# Altium PCB Generic_Axis_Channel_Blade.PcbDoc (part 3 of 3)
Units mm, origin at the board's own origin, x right, y up, seen from the top; angles counter-clockwise.
Board outline 87.5 x 97.62 mm, 4 copper layers (Top Layer 1, L2_GND, L3_PWR, Bottom Layer 1), stack 1.556 mm thick; 166 components, 595 nets, 662 pads, 1674 vias.
Unrouted connection lines stored in the file: 33.
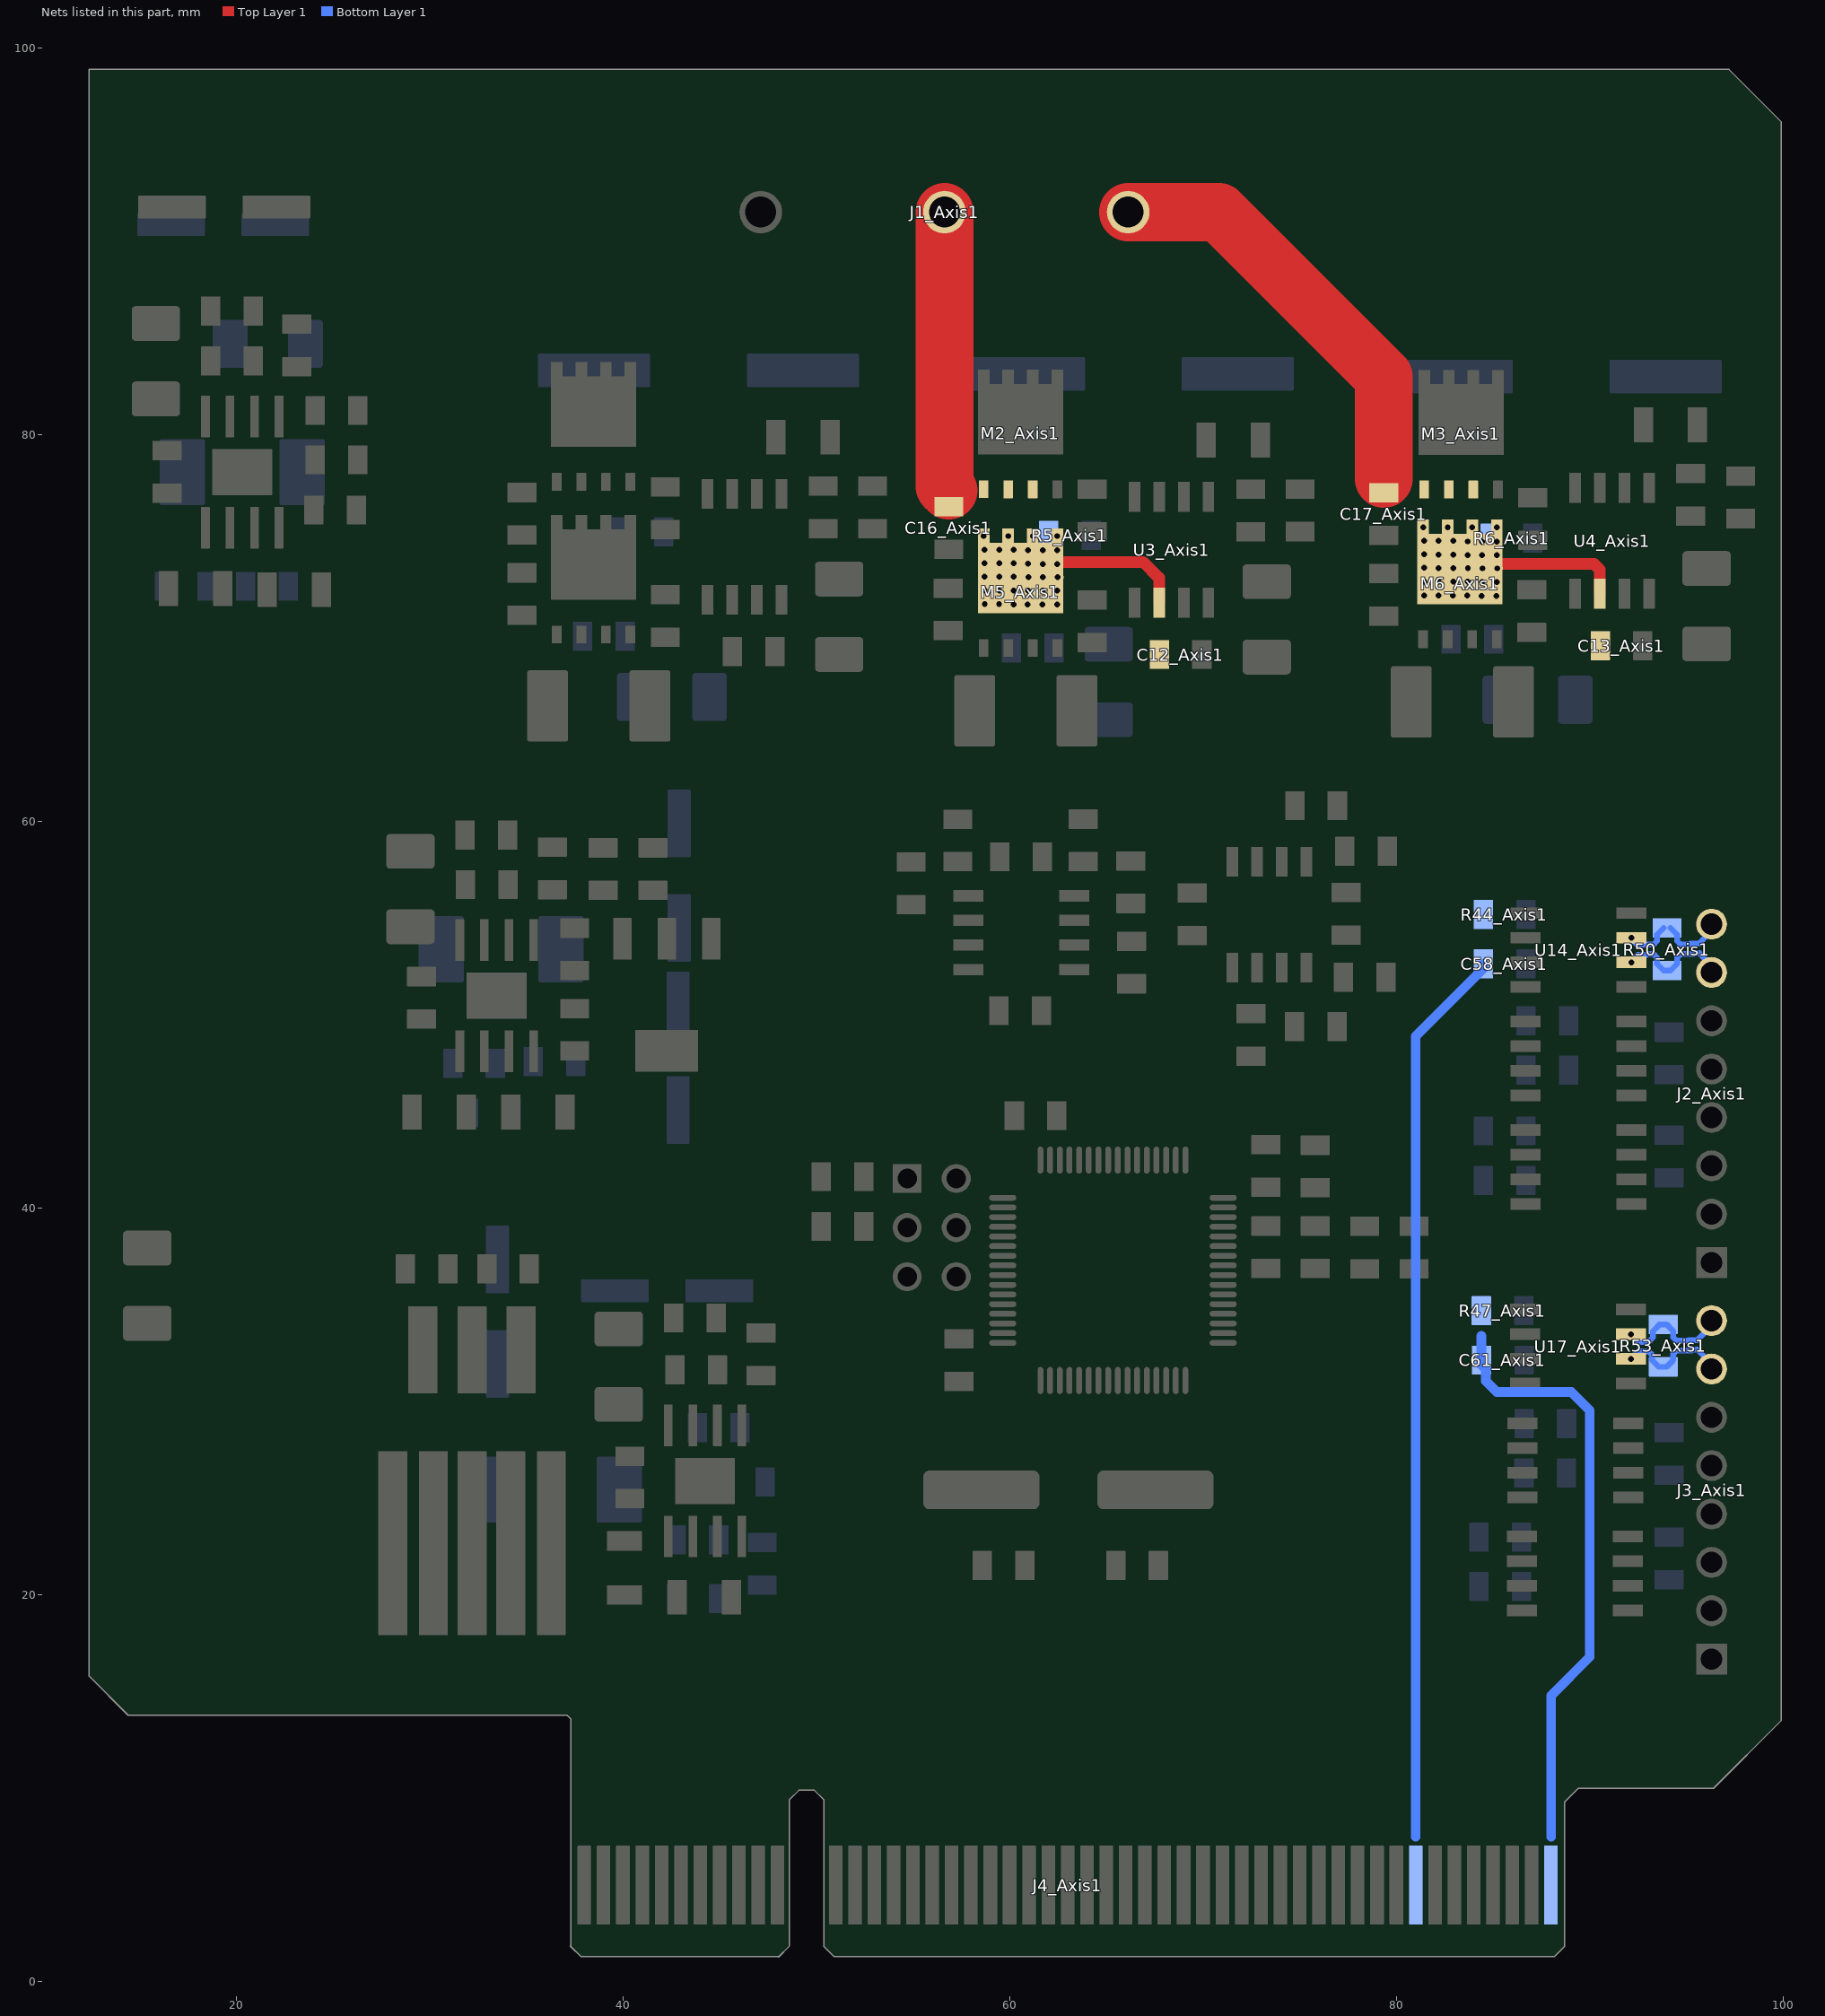
[diagram p5: the nets of this part, all layers, seen from the top]

## Via types
v1: diameter 0.6/0.6 (per signal layer), hole 0.3, Top Layer 1 to Bottom Layer 1, 1674 vias

## Nets (pads, with @x,y where several pads share a name; then routed paths per layer and width w, separated by ;. In a path a pad name is that pad's centre, name@x,y a point inside that pad or via, vN(x,y) a via of type N, cw(c..) or ccw(c..) an arc to the next point about the centre after c; other vN are vias at no path point) (continued)
Va_Axis4: 
Va_Axis5: 
Va_Axis6: 
Vb_Axis1: C12_Axis1.1 C16_Axis1.1 J1_Axis1.2 M2_Axis1.1 M2_Axis1.2 M2_Axis1.3 M5_Axis1.5 M5_Axis1.6 M5_Axis1.7 M5_Axis1.8 R5_Axis1.1 U3_Axis1.6 | length 21.1
  Top Layer 1 w0.6: M5_Axis1.5@62.729,73.432 66.897,73.432 67.729,72.601 U3_Axis1.6@67.729,71.323
  Top Layer 1 w3: J1_Axis1.2@56.629,91.523 56.629,77.346 56.852,77.123
  other v1: 60.936,71.228 61.69,71.222 62.451,71.222 58.712,71.246 59.455,71.246 60.199,71.24 61.708,71.942 62.468,71.942 58.702,71.967 59.456,71.96 60.217,71.96 60.954,71.949 60.972,72.649 61.726,72.642 62.486,72.642 58.702,72.667 59.456,72.66 60.217,72.66 60.954,73.334 61.708,73.327 62.469,73.327 58.702,73.367 59.456,73.36 60.217,73.36 61.708,74.027 62.469,74.027 60.954,74.034 58.702,74.067 59.456,74.06 60.217,74.06 58.657,74.769 59.927,74.769 61.197,74.769 62.467,74.769
Vb_Axis2: 
Vb_Axis3: 
Vb_Axis4: 
Vb_Axis5: 
Vb_Axis6: 
Vc_Axis1: C13_Axis1.1 C17_Axis1.1 J1_Axis1.3 M3_Axis1.1 M3_Axis1.2 M3_Axis1.3 M6_Axis1.5 M6_Axis1.6 M6_Axis1.7 M6_Axis1.8 R6_Axis1.1 U4_Axis1.6 | length 28.6
  Top Layer 1 w0.6: v1(81.429,73.823) M6_Axis1.5@81.529,73.923 ; M6_Axis1.5@85.438,73.323 90.229,73.323 90.514,73.038 U4_Axis1.6@90.514,71.782
  Top Layer 1 w3: J1_Axis1.3@66.129,91.523 70.829,91.523 79.345,83.007 79.345,77.723
  other v1: 83.663,71.684 84.417,71.678 85.178,71.678 81.439,71.702 82.182,71.702 82.926,71.696 84.435,72.398 85.196,72.398 81.429,72.423 82.183,72.416 82.944,72.416 83.681,72.405 83.699,73.105 84.453,73.098 85.213,73.098 81.429,73.123 82.183,73.116 82.944,73.116 83.681,73.789 84.435,73.783 85.196,73.783 82.183,73.816 82.944,73.816 84.435,74.483 85.196,74.483 83.681,74.49 81.429,74.523 82.183,74.516 82.944,74.516 81.384,75.225 82.654,75.225 83.924,75.225 85.194,75.225
Vc_Axis2: 
Vc_Axis3: 
Vc_Axis4: 
Vc_Axis5: 
Vc_Axis6: 
Z1_Axis1: C58_Axis1.2 J4_Axis1.A42 R44_Axis1.2 | length 46.6
  Bottom Layer 1 w0.5: 81,7.5 81,48.9 84.5,52.4 C58_Axis1.2@84.5,52.646
Z1_Axis1_N: J2_Axis1.8 R50_Axis1.2 U14_Axis1.7 | length 5.7
  Bottom Layer 1 w0.3: v1(92.154,53.993) 92.154,53.935 92.479,53.61 92.728,53.61 92.768,53.65 93.3,53.65 93.476,53.826 93.476,54.15 R50_Axis1.2@93.826,54.5 ; R50_Axis1.2@94.174,54.5 94.524,54.15 94.524,53.826 94.7,53.65 95.168,53.65 95.218,53.699 95.673,53.699 95.849,53.875 95.849,53.896 96.3,54.348 J2_Axis1.8@96.3,54.699
Z1_Axis1_P: J2_Axis1.7 R50_Axis1.1 U14_Axis1.6 | length 6.1
  Bottom Layer 1 w0.3: v1(92.154,52.718) 92.154,52.78 92.483,53.11 92.935,53.11 92.975,53.15 93.3,53.15 93.476,52.974 93.476,52.65 93.826,52.3 R50_Axis1.1@94,52.3 94.174,52.3 94.524,52.65 94.524,52.974 94.7,53.15 95.375,53.15 95.425,53.199 95.673,53.199 95.849,53.024 95.849,53.002 96.3,52.551 J2_Axis1.7@96.3,52.199
Z1_Axis2: 
Z1_Axis2_N: 
Z1_Axis2_P: 
Z1_Axis3: 
Z1_Axis3_N: 
Z1_Axis3_P: 
Z1_Axis4: 
Z1_Axis4_N: 
Z1_Axis4_P: 
Z1_Axis5: 
Z1_Axis5_N: 
Z1_Axis5_P: 
Z1_Axis6: 
Z1_Axis6_N: 
Z1_Axis6_P: 
Z2_Axis1: C61_Axis1.2 J4_Axis1.A49 R47_Axis1.2 | length 31.6
  Bottom Layer 1 w0.5: C61_Axis1.2@84.401,32.151 C61_Axis1.2@84.401,31.905 ; 84.401,33.405 C61_Axis1.2@84.401,31.905 ; 88,7.5 88,14.8 90,16.8 90,29.55 89.05,30.5 85.2,30.5 84.628,31.072 84.628,31.678 C61_Axis1.2@84.401,31.905
Z2_Axis1_N: J3_Axis1.8 R53_Axis1.2 U17_Axis1.7 | length 6
  Bottom Layer 1 w0.3: v1(92.135,33.485) 92.135,33.447 92.485,33.097 93.047,33.097 93.276,33.326 93.276,33.65 93.626,34 R53_Axis1.2@93.8,34 93.974,34 94.324,33.65 94.324,33.326 94.5,33.15 95.072,33.15 95.114,33.191 95.569,33.191 96.3,33.922 J3_Axis1.8@96.3,34.191
Z2_Axis1_P: J3_Axis1.7 R53_Axis1.1 U17_Axis1.6 | length 6
  Bottom Layer 1 w0.3: v1(92.135,32.21) 92.135,32.248 92.485,32.597 93.047,32.597 93.223,32.422 93.223,32.15 93.573,31.8 R53_Axis1.1@93.8,31.8 93.974,31.8 94.324,32.15 94.324,32.474 94.5,32.65 95.279,32.65 95.321,32.691 95.569,32.691 96.3,31.96 J3_Axis1.7@96.3,31.691
Z2_Axis2: 
Z2_Axis2_N: 
Z2_Axis2_P: 
Z2_Axis3: 
Z2_Axis3_N: 
Z2_Axis3_P: 
Z2_Axis4: 
Z2_Axis4_N: 
Z2_Axis4_P: 
Z2_Axis5: 
Z2_Axis5_N: 
Z2_Axis5_P: 
Z2_Axis6: 
Z2_Axis6_N: 
Z2_Axis6_P: 
pads on no net: J4_Axis1.A12 J4_Axis1.A13 J4_Axis1.A14 J4_Axis1.A15 J4_Axis1.A16 J4_Axis1.A18 J4_Axis1.A20 J4_Axis1.A22 J4_Axis1.A24 J4_Axis1.A26 J4_Axis1.A28 J4_Axis1.A29 J4_Axis1.A30 J4_Axis1.A31 J4_Axis1.A32 J4_Axis1.A33 J4_Axis1.A34 J4_Axis1.A35 J4_Axis1.A36 J4_Axis1.A37 J4_Axis1.A38 J4_Axis1.A39 J4_Axis1.A40 J4_Axis1.A41 J4_Axis1.A45 J4_Axis1.A46 J4_Axis1.B12 J4_Axis1.B13 J4_Axis1.B14 J4_Axis1.B15 J4_Axis1.B16 J4_Axis1.B17 J4_Axis1.B18 J4_Axis1.B19 J4_Axis1.B20 J4_Axis1.B21 J4_Axis1.B22 J4_Axis1.B23 J4_Axis1.B24 J4_Axis1.B25 J4_Axis1.B26 J4_Axis1.B27 J4_Axis1.B28 J4_Axis1.B29 J4_Axis1.B30 J4_Axis1.B31 J4_Axis1.B32 J4_Axis1.B33 J4_Axis1.B34 J4_Axis1.B39 J4_Axis1.B40 J4_Axis1.B41 J4_Axis1.B42 J4_Axis1.B43 J4_Axis1.B44 J4_Axis1.B45 J4_Axis1.B46 J4_Axis1.B47 J4_Axis1.B48 J4_Axis1.B49 J_SWD_Axis1.6 U1_Axis1.16 U1_Axis1.17 U1_Axis1.18 U1_Axis1.19 U5_Axis1.4 U6_Axis1.16 U6_Axis1.17 U6_Axis1.18 U6_Axis1.19 U8_Axis1.2 U8_Axis1.5 U8_Axis1.6 U8_Axis1.8 U8_Axis1.9 U8_Axis1.10 U8_Axis1.11 U8_Axis1.12 U8_Axis1.13 U8_Axis1.14 U8_Axis1.16 U8_Axis1.17 U8_Axis1.22 U8_Axis1.23 U8_Axis1.24 U8_Axis1.25 U8_Axis1.26 U8_Axis1.30 U8_Axis1.33 U8_Axis1.35 U8_Axis1.36 U8_Axis1.38 U8_Axis1.39 U8_Axis1.40 U8_Axis1.41 U8_Axis1.42 U8_Axis1.43 U8_Axis1.44 U8_Axis1.45 U8_Axis1.46 U8_Axis1.51 U8_Axis1.52 U8_Axis1.53 U8_Axis1.54 U8_Axis1.55 U8_Axis1.56 U8_Axis1.57 U8_Axis1.58 U8_Axis1.59 U8_Axis1.60 U8_Axis1.61 U8_Axis1.62 U9_Axis1.4 U10_Axis1.16 U10_Axis1.17 U10_Axis1.18 U10_Axis1.19 U12_Axis1.4 U13_Axis1.4 U14_Axis1.4 U15_Axis1.4 U16_Axis1.4 U17_Axis1.4
copper on no net: | length 12.6
  Top Layer 1 w0.254: 58.542,25.434 58.542,25.742 ; 62.593,31.095 62.6,31.089
  Top Layer 1 w0.6: 85.213,73.098 85.438,73.323
  Top Layer 1 w0.8: 90.514,69.134 90.546,69.101
  Top Layer 1 w1: 54.535,36.3 54.699,36.464
  Top Layer 1 w3: 51.6,46.3 51.7,46.4 51.7,50.3 ; 51.6,49.2 51.6,50.8 ; 51.7,49.2 51.7,50.3 ; 53.9,53.4 51.7,51.2 51.7,50.3 ; 51.6,50.8 51.7,50.7 ; 51.6,50.8 51.7,50.7 ; 51.7,50.3 51.7,50.7
  Bottom Layer 1 w0.5: 77.9,5.1 78,5 ; 79.9,5.1 80,5

## Polygon pours and split planes (outlines as drawn)
"MAIN VCC" on Bottom Layer 1 "MAIN_VCC_L04_P010" (solid, pour order 10): 48.2,6 37.6,6 37.6,14.5 14.9,14.5 13.2,16.2 13.2,35.9 20.4,35.9 26.7,29.6 26.7,22.3 37.4,22.3 39,20.7 42.7,20.7 42.7,23 43.7,24 44.4,24 44.4,18.8 48.2,15
DGND on Bottom Layer 1 "DGND_L04_P017" (solid, remove dead copper, pour order 17): 51.3,7.5 51.5,7.7 88.5,7.7 88.5,10 89.3,10.8 96.1,10.8 96.1,10.9 99.2,14 99.1,14.1 99.1,73.9 93.1,79.9 93,79.8 89.9,79.8 89.9,70 92.7,67.2 92.7,63.9 91.6,62.8 91.5,62.9 78.1,62.9 78.1,67.2 73,72.3 73,76.8 71.3,78.5 70.6,77.8 67.2,77.8 67.2,69.7 69.5,67.4 69.5,62.7 63.8,62.7 56.8,69.7 55.4,69.7 55.4,69.9 48.4,76.9 48.4,79.2 44.4,79.2 43.3,77.5 43.3,68.4 45.3,68.4 46.5,67.2 46.5,63 56.1,53.031 56.1,47.3 50.997,47.3 48.7,45.003 48.7,11 50.2,11 51.3,9.9
Vc_Axis1 on Bottom Layer 1 "VC_AXIS1_L04_P014" (solid, pour order 14): 76.4,79.7 76.4,71.7 77.3,70.8 88.3,70.8 89.4,71.9 89.4,97.8 89.3,97.9 65.7,97.9 64.3,96.5 64.3,90.2 67.5,87 73.3,87 73.3,86.9 76.4,83.8
Vb_Axis1 on Bottom Layer 1 "VB_AXIS1_L04_P012" (solid, pour order 12): 56.6,70.7 65.3,70.7 66.9,72.3 66.9,85.6 62.7,89.8 62.7,96.4 61.6,97.5 54.3,97.5 53.4,96.6 53.4,82.4 54.3,81.5 54.3,73.575
Va_Axis1 on Bottom Layer 1 "VA_AXIS1_L04_P011" (solid, remove dead copper, pour order 11): 41.1,71 41.1,83.9 46.3,89.1 51.2,89.1 52.8,90.7 52.8,96.9 52.4,97.3 31.5,97.3 28,93.8 28,73.6 30.6,71 40.2,71
"AMP1 IN_Axis1_P" on Top Layer 1 "AMP1_IN_AXIS1_P_L01_P009" (solid, remove dead copper, pour order 9): 77.7,67.9 77.7,72.179 86.921,72.179 88.8,70.3 88.7,67.9 98.75,67.9 98.75,95.55 96.7,97.6 13.246,97.2 13.246,35.91 20.48,35.891 26.485,29.885 26.672,17.528 37.6,14.493 37.6,5.3 48.2,5.3 48.2,54.1 49.9,55.8 49.9,65.4 52.4,67.9
AGND on Top Layer 1 "AGND_L01_P015" (solid, remove dead copper, pour order 15): 82,35.5 72.1,35.5 70.5,37.1 70.5,41.9 65.3,41.9 63.5,43.7 63.5,46.085 50.5,55.337 50.5,62.1 51.3,62.9 84.7,62.9 85.4,62.2 85.4,38.1
DGND on Top Layer 1 "DGND_L01_P016" (solid, remove dead copper, pour order 16): 99.2,62 98.3,62.9 87,62.9 86,61.9 86,37.834 82.5,35.1 71.485,35.1 71.485,39.427 74.316,40.23 74.236,41.675 72.502,42.286 71.485,40.915 68.9,43.5 63.5,43.5 63.5,45.593 60.8,47.5 49.6,47.5 48.7,45.8 48.7,11 50.3,11 51.6,9.7 51.6,7.6 87.5,7.6 87.6,7.5 87.8,7.7 87.8,10.7 95.9,10.7 99.2,14
"MAIN VCC" on L3_PWR (split plane): 287 vertices, not listed, extent 12.91,1.807 99.39,98.39
+12 on L3_PWR (split plane): 98.799,95.675 98.799,78.4 98.799,77.325 98.575,77.101 96.301,77.101 96.301,78.3 96.301,79.1 96.301,93.9 96.296,93.959 96.279,94.015 96.251,94.067 96.213,94.113 95.213,95.113 95.167,95.151 95.115,95.179 95.059,95.196 95,95.201 76.2,95.201 76.141,95.196 76.085,95.179 76.033,95.151 75.987,95.113 75.949,95.067 75.921,95.015 75.904,94.959 75.899,94.9 75.899,78.1 75.899,76.601 74.001,76.601 74.001,94.1 73.996,94.159 73.979,94.215 73.951,94.267 73.913,94.313 73.113,95.113 73.067,95.151 73.015,95.179 72.959,95.196 72.9,95.201 55.8,95.201 55.741,95.196 55.685,95.179 55.633,95.151 55.587,95.113 54.387,93.913 54.349,93.867 54.321,93.815 54.304,93.759 54.299,93.7 54.299,77.325 53.475,76.501 52.425,76.501 52.001,76.925 52.001,93.7 51.996,93.759 51.979,93.815 51.951,93.867 51.913,93.913 50.513,95.313 50.467,95.351 50.415,95.379 50.359,95.396 50.3,95.401 28.7,95.401 28.641,95.396 28.585,95.379 28.533,95.351 28.487,95.313 27.687,94.513 27.649,94.467 27.621,94.415 27.604,94.359 27.599,94.3 27.599,84.025 26.375,82.801 24.925,82.801 24.301,83.425 24.301,86.7 24.296,86.759 24.279,86.815 24.251,86.867 24.213,86.913 20.001,91.125 20.001,97.475 20.225,97.699 96.775,97.699
+5 on L3_PWR (split plane): 98.999,14.7 98.999,14.125 95.875,11.001 83.725,11.001 80.301,14.425 80.301,24.3 80.296,24.359 80.279,24.415 80.251,24.467 80.213,24.513 78.613,26.113 78.567,26.151 78.515,26.179 78.459,26.196 78.4,26.201 54.425,26.201 46.613,34.013 46.567,34.051 46.515,34.079 46.459,34.096 46.4,34.101 35.3,34.101 35.241,34.096 35.185,34.079 35.133,34.051 35.087,34.013 30.775,29.701 27.825,29.701 26.801,30.725 26.801,37.675 27.825,38.699 34.2,38.699 34.259,38.704 34.315,38.721 34.367,38.749 34.413,38.787 35.425,39.799 48.348,39.799 48.348,38.4 48.356,38.335 48.382,38.274 48.422,38.222 49.222,37.422 49.274,37.382 49.335,37.356 49.4,37.348 49.5,37.348 49.565,37.356 49.626,37.382 49.678,37.422 49.704,37.448 52.296,37.448 53.048,36.696 53.048,34.8 53.056,34.735 53.082,34.674 53.122,34.622 54.548,33.196 54.548,31.8 54.556,31.735 54.582,31.674 54.622,31.622 56.222,30.022 56.274,29.982 56.335,29.956 56.4,29.948 83.496,29.948 84.248,29.196 84.248,18.9 84.256,18.835 84.282,18.774 84.322,18.722 85.022,18.022 85.051,17.999 85.074,17.982 85.092,17.974 85.135,17.956 85.2,17.948 92.9,17.948 92.965,17.956 93.026,17.982 93.078,18.022 93.578,18.522 93.596,18.544 93.618,18.574 93.644,18.635 93.652,18.7 93.652,56.099 98.999,56.099
+3.3 on L3_PWR (split plane): 70.699,58.775 70.699,51.2 70.704,51.141 70.721,51.085 70.749,51.033 70.787,50.987 70.987,50.787 71.033,50.749 71.085,50.721 71.141,50.704 71.2,50.699 82,50.699 82.059,50.704 82.115,50.721 82.167,50.749 82.213,50.787 82.251,50.833 82.279,50.885 82.295,50.938 83.678,52.322 83.718,52.374 83.744,52.435 83.752,52.5 83.752,55.896 84.004,56.148 93.148,56.148 93.148,18.804 92.796,18.452 85.304,18.452 84.752,19.004 84.752,29.3 84.744,29.365 84.718,29.426 84.678,29.478 83.778,30.378 83.726,30.418 83.665,30.444 83.6,30.452 56.504,30.452 55.052,31.904 55.052,33.3 55.044,33.365 55.018,33.426 54.978,33.478 53.552,34.904 53.552,36.8 53.544,36.865 53.518,36.926 53.478,36.978 52.578,37.878 52.526,37.918 52.465,37.944 52.4,37.952 49.6,37.952 49.535,37.944 49.492,37.926 49.474,37.918 49.454,37.903 48.852,38.504 48.852,42.64 48.844,42.705 48.818,42.766 48.778,42.818 44.698,46.898 44.646,46.938 44.585,46.963 44.52,46.972 44.455,46.963 44.394,46.938 44.342,46.898 43.5,46.057 40.557,49 43.704,52.148 53.796,52.148 55.105,50.838 55.121,50.785 55.149,50.733 55.187,50.687 55.233,50.649 55.285,50.621 55.341,50.604 55.4,50.599 67.4,50.599 67.459,50.604 67.515,50.621 67.567,50.649 67.613,50.687 67.651,50.733 67.679,50.785 67.696,50.841 67.701,50.9 67.701,58.275 68.625,59.199 70.275,59.199
"AMP1 IN_Axis1_P" on L2_GND (split plane): 48.09,2.039 47.861,1.81 38.038,1.81 37.808,2.04 37.808,3.149 47.8,3.149 47.839,3.154 47.876,3.169 47.907,3.193 48.09,3.376
"AMP1 IN_Axis1_P" on L2_GND (split plane): 99.39,95.992 99.39,13.711 96.189,10.51 91.32,10.51 91.331,10.524 91.346,10.561 91.351,10.6 91.346,10.639 91.331,10.676 91.307,10.707 91.276,10.731 91.239,10.746 91.2,10.751 88.8,10.751 88.785,10.749 88.761,10.746 88.724,10.731 88.701,10.713 88.693,10.707 88.193,10.207 88.178,10.188 88.169,10.176 88.158,10.148 88.154,10.139 88.151,10.115 88.149,10.1 88.149,10 88.149,3.763 87.737,3.351 51.063,3.351 51.051,3.363 51.051,9.5 51.046,9.539 51.04,9.554 51.031,9.576 51.007,9.607 50.207,10.407 50.176,10.431 50.139,10.446 50.11,10.45 50.1,10.451 48.9,10.451 48.861,10.446 48.831,10.434 48.824,10.431 48.815,10.424 48.793,10.407 48.093,9.707 48.069,9.676 48.054,9.639 48.05,9.61 48.049,9.6 48.049,3.763 47.737,3.451 37.863,3.451 37.851,3.463 37.851,13 37.846,13.039 37.831,13.076 37.808,13.105 37.808,13.602 37.799,13.702 37.77,13.797 37.722,13.886 37.659,13.963 37.474,14.148 37.397,14.211 37.308,14.259 37.213,14.288 37.113,14.297 14.624,14.297 12.91,16.011 12.91,98.39 96.992,98.39
"AMP1 IN_Axis1_P" on L2_GND (split plane): 88.19,2.037 87.961,1.807 51.136,1.807 50.91,2.032 50.91,3.08 50.924,3.069 50.938,3.063 50.961,3.054 50.972,3.052 51,3.049 87.8,3.049 87.816,3.051 87.839,3.054 87.848,3.058 87.876,3.069 87.888,3.078 87.907,3.093 88.19,3.376
"AMP1 IN_Axis1_P" on L2_GND (split plane): 89.116,10.424 89.039,10.361 88.451,9.773 88.451,10 88.451,10.037 88.863,10.449 89.162,10.449

## Other copper
Top Layer 1:
  rectangle net "MAIN VCC": 39.3,19.5 43,20.5
  rectangle net NetC50_Axis1_1: 34.657,33.3 35.7,37.6
  rectangle net NetC20_Axis1_1: 70.4,38.5 71.7,39.2
  rectangle net NetC45_Axis1_2: 67.2,21.7 68.2,25.2
  rectangle net NetC46_Axis1_2: 58.1,21.9 59.1,25.1
  region net "AMP1 IN_Axis1_P": 91.8,64.5 91.3,64 85.3,64 84.9,64.4 84.9,68.1 85.1,68.3 88.2,68.3 88.2,67.9 89,67.1 91.5,67.1 91.8,66.8
  region net "AMP1 IN_Axis1_P": 69.3,64 68.8,63.5 62.8,63.5 62.4,63.9 62.4,67.6 62.6,67.8 65.7,67.8 65.7,67.4 66.5,66.6 69,66.6 69.3,66.3
  region net "AMP1 IN_Axis1_P": 39.4,48.4 39.4,45.2 38.1,43.9 36.4,43.9 36.2,44.1 36.2,46.1 36.6,46.5 36.6,48.6 36.8,48.8 39.2,48.8
  region net "AMP1 IN_Axis1_P": 38.1,43.9 41,43.9 41.3,44.2 41.3,45.5 39.7,45.5 39.2,46
  region net NetD4_Axis1_2: 84.829,70.023 84.829,69.023 85.029,68.823 87.629,68.823 88.129,69.323 88.129,70.423 87.929,70.623 85.329,70.623
  region net +3.3: 44.2,47 46.8,47 48.1,48.3 48.1,51.1 47.3,51.9 44.2,51.9
  region net +3.3: 40.8,56 41.8,55 41.8,50.5 40.6,49.145 40.6,47 40.9,46.7 43.9,46.7 44.2,47 44.2,51.9 42.746,53.354 42.746,56.475 42.282,56.94
  region net NetC39_Axis1_1: 37.2,58.336 37,58.1 34.9,58.1 34.5,58.5 33.6,58.5 33.4,58.7 33.4,60 33.6,60.2 36.2,60.2 37.2,59.2
  region net NetC34_Axis1_1: 38.273,49.818 40,51.544 40,52.789 36.789,52.789 36.6,52.6 36.6,49.799
  region net NetC34_Axis1_1: 39.496,51.604 39.3,51.8 38,51.8 38,52.5 39.6,54.1
  region net NetC34_Axis1_1: 39.496,52.863 39.496,51.604 39.8,51.3 41.2,51.3 41.4,51.5 41.4,52.6 40.4,53.6
  region net NetR29_Axis1_2: 35.6,52.8 36.8,54 38.3,54 38.7,54.4 38.7,55.3 39.1,55.7 39.7,55.7 40,56 40,57.1 39.8,57.3 38.4,57.3 37.6,56.5 37.6,55.5 37.4,55.3 35.151,55.3 35.151,52.8 35.2,52.8
  region net NetC38_Axis1_1: 34.3,54.9 34.3,55.7 34.6,56 37.1,56 37.2,56.1 37.2,57 37,57.2 34.9,57.2 34.5,57.6 33.5,57.6 33.4,57.5 33.4,56 33.9,55.5 33.9,54.7
  region net "MAIN VCC": 31.4,44.1 34.7,44.1 34.7,45.9 34,45.9 33.1,46.8 33.1,49.1 32.6,49.1 32.6,46.9 31.4,45.7
  region net NetC31_Axis1_2: 31.8,49.1 31.2,49.1 30.3,50 30.3,50.3 28.9,50.3 28.8,50.2 28.8,47.7 29.454,47.046 31.548,47.046 31.8,47.302
  region net NetC31_Axis1_1: 28.8,51.4 27.6,52.6 27.6,55.4 27.8,55.6 31.2,55.6 31.8,55 31.8,52.7 31.4,52.3 30.6,51.4
  region net "MAIN VCC": 19.4,76.3 19.4,73.9 18.7,73.2 18.7,71.1 22.2,71.1 22.3,71.2 22.3,72.9 21.9,73.3 20.3,73.3 19.9,73.7 19.9,76.3
  region net "MAIN VCC": 43.7,21.5 44.1,21.9 44.1,23.8 43.8,24.1 43.5,24.1
  region net +3.3: 72.5,43.8 72.4,43.7 72.4,42.9 72.6,42.7 76.6,42.7 76.8,42.9 76.8,43.7 76.6,43.9 72.6,43.9
  region net +3.3: 57.7,31.7 59.1,33.1 60.3,33.1 61.7,31.7 61.7,30.3 61.4,30 56.8,30 56.4,30.4 56.4,31.5 56.6,31.7
  region net +3.3: 52.2,42.5 51.8,42.3 51.8,41.1 52.2,40.7 55.5,40.7 55.7,40.9 55.7,42.3 55.5,42.5
  region net MOSI_Axis1: 76.65,6.993 76.65,7.496 76.847,7.693 77.151,7.693 77.35,7.494 77.35,6.893
  region net MISO_Axis1: 75.65,6.993 75.65,7.471 75.873,7.693 76.128,7.693 76.35,7.472 76.35,6.893
  region net SCK_Axis1: 74.65,6.993 74.65,7.473 74.87,7.693 75.129,7.693 75.35,7.473 75.35,6.893
  region net CS_Axis1: 73.65,6.993 73.65,7.496 73.847,7.693 74.151,7.693 74.35,7.494 74.35,6.893
  region net NetC22_Axis1_1: 60.886,57.529 62.586,55.829 64.186,55.829 64.586,56.229 65.286,56.929 67.186,56.929 67.486,57.229 67.486,58.729 66.986,59.229 61.086,59.229 60.886,59.029
  region net NetC27_Axis1_1: 60.315,57.529 58.615,55.829 57.015,55.829 56.615,56.229 55.915,56.929 54.015,56.929 53.715,57.229 53.715,58.729 54.215,59.229 60.115,59.229 60.315,59.029
  region net NetC43_Axis1_1: 76.7,55.471 75,57.171 75,58.771 75.4,59.171 76.1,59.871 76.1,61.771 76.4,62.071 77.9,62.071 78.4,61.571 78.4,55.671 78.2,55.471
  region net NetC42_Axis1_1: 76.7,54.9 75,53.2 75,51.6 75.4,51.2 76.1,50.5 76.1,48.6 76.4,48.3 77.9,48.3 78.4,48.8 78.4,54.7 78.2,54.9
  region net "AMP2 IN_Axis1_N": 79.529,64.123 79.229,64.573 79.229,67.716 78.129,68.816 78.129,71.323 79.977,71.323 80.6,70.123 84.329,70.123 84.329,69.023 84.029,68.723 82.329,68.723 81.829,68.223 81.829,64.573 81.529,64.123
  region net NetC50_Axis1_1: 35.5,34.9 35.6,34.9 37.1,33.4 37.1,30.8 36.7,30.4 36.6,30.5 34,30.5
  region net NetC54_Axis1_1: 47.9,30.9 47.9,31.8 47.6,32.1 45.7,32.1 45.4,32.4 44.4,32.4 44.4,30.1 44.7,29.8 45.1,29.8 45.1,30 45.8,30.7 47.7,30.7
  region net NetC55_Axis1_1: 47.8,34.2 46.2,34.2 45.3,35.1 44.3,35.1 44.1,34.9 44.1,33.7 44.5,33.3 46.1,33.3 46.5,32.9 47.8,32.9 48,33.1 48,34
  region net NetC47_Axis1_1: 41.091,26.6 41.991,27.7 42.6,27.7 42.7,27.8 42.7,29.9 42.4,30.2 41.4,30.2 41.4,30.3 40.9,30.8 38.6,30.8 38.3,30.5 38.3,27.4 39.1,26.6
  region net +5: 30.5,35.4 29.6,36.3 29.6,38.3 29.2,38.7 27.8,38.7 26.8,37.7 26.8,30.7 27.8,29.7 30.2,29.7 30.5,30
  region net NetC20_Axis1_1: 76.6,41.6 76.7,41.5 76.7,39.8 77,39.5 76.8,39.3 74.4,39.3 74.4,39.5 74.9,40 74.9,41.5 75,41.6
  region net +12: 53.589,81.45 52.989,81.45 52.789,81.25 52.789,78.25 52.389,77.85 52.189,77.85 52.189,76.95 52.289,76.85 53.789,76.85 54.089,77.15 54.089,80.95
  region net +12: 75.7,81.3 75.1,81.3 74.9,81.1 74.9,78.1 74.5,77.7 74.3,77.7 74.3,76.8 74.4,76.7 75.9,76.7 76.2,77 76.2,80.8
  region net +12: 98.5,78.2 98.7,78.5 98.7,79.9 98.5,80.1 97,80.1 96.9,80 96.9,78.4 97.1,78.2
  region net NetC18_Axis1_1: 24,83.9 23.8,84.1 22,84.1 21.4,84.7 20.4,84.7 20.3,84.6 20.3,82.324 20.724,81.9 21.172,81.9 21.172,82.372 21.8,83 23.9,83 24,83.1
  region net NetC19_Axis1_1: 24,85.3 23.8,85.1 22,85.1 21.6,85.5 20.5,85.5 20.3,85.7 20.3,87.3 20.5,87.5 21.4,87.5 22.6,86.3 23.9,86.3 24,86.2
  region net NetR8_Axis1_2: 21.957,79.933 21.957,79.905 22.361,79.5 23.2,79.5 23.5,79.2 23.5,77.8 24.5,77.8 24.7,78 24.7,82 24.6,82.1 22.1,82.1 21.944,81.944
  region net +12: 26.9,80.6 26.7,80.4 25.8,80.4 25.7,80.5 25.7,82.5 24.8,83.4 24.8,86.4 25.1,86.7 26.5,86.7 26.8,86.4
  region net NetC7_Axis1_1: 18.678,81.975 18.674,79.927 18.547,79.8 18.3,79.8 17.1,78.6 15.6,78.6 14.5,79.7 14.5,82.6 14.8,82.9 17.3,82.9 18.1,82.1 18.554,82.1
  region net NetC7_Axis1_2: 18.728,76.272 18.7,74.1 18.6,74 18.2,74 15.6,76.6 15.6,77.6 15.7,77.7 17.1,77.7 18.4,76.4 18.6,76.4
  region net NetR16_Axis1_2: 22.4,74.1 23.6,75.3 24.5,75.3 24.6,75.4 24.6,76.9 24.5,77 23.5,77 22.8,76.3 22,76.3 21.9,76.2 21.9,74.2 22,74.1
  region net NetC20_Axis1_1: 71.604,38.391 71.811,38.527 81.7,38.6 81.8,38.7 81.8,39.422 81.644,39.578 72.078,39.578 71.7,39.2
  region net NetC41_Axis1_2: 50.9,42.2 50.7,42.4 50.7,42.5 49.9,42.5 49.6,42.2 49.6,38.3 49.8,38.1 50.8,38.1 50.9,38.2
  region net NetC2_Axis1_1: 74.445,71.763 76.145,73.463 76.145,75.663 75.645,76.163 71.445,76.163 70.745,76.863 70.745,77.224 69.945,77.224 70.045,77.124 70.045,75.563 71.145,74.463 71.145,72.563 71.945,71.763
  region net NetC2_Axis1_1: 69.945,78.324 69.945,77.224 70.745,77.224 70.745,80.724 70.145,81.324 70.045,81.224 69.345,81.224 69.045,80.924 69.045,79.224
  region net NetC16_Axis1_2: 55.936,74.603 56.136,74.803 57.536,74.803 57.736,74.603 57.736,71.603 57.536,71.403 56.136,71.403 55.936,71.603
  region net NetM2_Axis1_4: 62.144,78.162 62.144,76.962 62.544,76.562 65.044,76.562 65.344,76.862 65.344,78.162 65.144,78.362 62.344,78.362
  region net Vb_Axis1: 61.602,77.267 61.002,77.867 55.802,77.867 55.302,77.367 55.302,75.867 55.702,75.467 57.902,75.467 58.302,75.067 58.302,70.767 62.502,70.767 62.802,71.067 62.802,75.267 62.102,75.267 61.602,75.767
  region net "AMP1 IN_Axis1_N": 57.038,63.649 56.738,64.099 56.738,68.449 55.638,69.549 55.638,70.849 57.438,70.849 58.638,69.649 61.838,69.649 61.838,68.549 61.538,68.249 59.838,68.249 59.338,67.749 59.338,64.099 59.038,63.649
  region net NetR10_Axis1_1: 65.402,70.5 65.002,70.9 63.502,70.9 63.302,71.1 63.302,71.9 63.502,72.1 66.902,72.1 67.002,72 67.002,70.6 66.902,70.5
  region net NetD3_Axis1_2: 62.102,69.5 62.102,68.5 62.302,68.3 64.902,68.3 65.402,68.8 65.402,69.9 65.202,70.1 62.602,70.1
  region net Vb_Axis1: 67.545,70.763 67.245,70.463 67.245,69.263 68.145,69.263 68.245,69.363 68.245,70.463 67.945,70.763
  region net NetC12_Axis1_2: 74.745,67.863 74.245,67.463 69.945,67.463 69.245,68.163 69.245,69.363 69.745,69.863 74.445,69.863 74.745,69.563
  region net NetC12_Axis1_2: 69.745,69.863 69.991,70.11 69.991,72.11 70.045,72.163 70.545,72.163 73.045,69.663 73.345,69.663
  region net NetR9_Axis1_1: 43.323,70.772 42.923,71.172 41.423,71.172 41.223,71.372 41.223,72.172 41.423,72.372 44.823,72.372 44.923,72.272 44.923,70.872 44.823,70.772
  region net NetD2_Axis1_2: 40.023,70.063 40.023,69.063 40.223,68.863 42.823,68.863 43.323,69.363 43.323,70.463 43.123,70.663 40.523,70.663
  region net NetM1_Axis1_4: 40.065,78.127 40.065,76.927 40.465,76.527 42.965,76.527 43.265,76.827 43.265,78.127 43.065,78.327 40.265,78.327
  region net NetC11_Axis1_2: 52.667,68.013 52.167,67.613 47.867,67.613 47.167,68.313 47.167,69.513 47.667,70.013 52.367,70.013 52.667,69.713
  region net NetC1_Axis1_1: 52.136,71.682 54.067,73.613 54.067,75.813 53.567,76.313 49.367,76.313 48.667,77.013 48.667,77.373 47.867,77.373 47.967,77.273 47.967,75.713 49.067,74.613 49.067,72.713 50.098,71.682
  region net NetC11_Axis1_2: 47.667,70.013 47.914,70.26 47.914,72.26 47.967,72.313 48.467,72.313 50.967,69.813 51.267,69.813
  region net NetC1_Axis1_1: 47.867,78.473 47.867,77.373 48.667,77.373 48.667,80.873 48.02,81.373 47.967,81.373 47.267,81.373 46.967,81.073 46.967,79.373
  region net Va_Axis1: 45.467,70.913 45.167,70.613 45.167,69.413 46.067,69.413 46.167,69.513 46.167,70.613 45.867,70.913
  region net Va_Axis1: 39.523,78.075 38.923,78.675 33.723,78.675 33.223,78.175 33.223,76.675 33.623,76.275 35.823,76.275 36.223,75.875 36.223,71.575 40.423,71.575 40.723,71.875 40.723,76.075 40.023,76.075 39.523,76.575
  region net NetC15_Axis1_2: 33.857,75.331 34.057,75.531 35.457,75.531 35.657,75.331 35.657,72.331 35.457,72.131 34.057,72.131 33.857,72.331
  region net NetM4_Axis1_1: 34.957,64.166 34.657,64.616 34.657,68.966 33.557,70.066 33.557,71.366 35.357,71.366 36.557,70.166 39.52,70.166 39.52,68.829 39.457,68.766 37.757,68.766 37.257,68.266 37.257,64.616 36.957,64.166
  region net Vc_Axis1: 90.329,71.223 90.029,70.923 90.029,69.723 90.929,69.723 91.029,69.823 91.029,70.923 90.729,71.223
  region net Vc_Axis1: 84.329,77.723 83.729,78.323 78.529,78.323 78.029,77.823 78.029,76.323 78.429,75.923 80.629,75.923 81.029,75.523 81.029,71.223 85.229,71.223 85.529,71.523 85.529,75.723 84.829,75.723 84.329,76.223
  region net NetR11_Axis1_1: 88.129,71.023 87.729,71.423 86.229,71.423 86.029,71.623 86.029,72.423 86.229,72.623 89.629,72.623 89.729,72.523 89.729,71.123 89.629,71.023
  region net NetC13_Axis1_2: 97.529,68.323 97.029,67.923 92.729,67.923 92.029,68.623 92.029,69.823 92.529,70.323 97.229,70.323 97.529,70.023
  region net NetC13_Axis1_2: 92.529,70.323 92.776,70.57 92.776,72.57 92.829,72.623 93.329,72.623 95.829,70.123 96.129,70.123
  region net NetC3_Axis1_1: 92.729,78.783 92.729,77.683 93.529,77.683 93.529,81.183 92.929,81.783 92.829,81.683 92.129,81.683 91.829,81.383 91.829,79.683
  region net NetM3_Axis1_4: 84.929,77.723 84.929,76.523 85.329,76.123 87.829,76.123 88.129,76.423 88.129,77.723 87.929,77.923 85.129,77.923
  region net NetC3_Axis1_1: 97.229,72.223 98.929,73.923 98.929,76.123 98.429,76.623 94.229,76.623 93.529,77.323 93.529,77.683 92.729,77.683 92.829,77.583 92.829,76.023 93.929,74.923 93.929,73.023 94.729,72.223
  region net NetC17_Axis1_2: 78.429,75.323 78.629,75.523 80.029,75.523 80.229,75.323 80.229,72.323 80.029,72.123 78.629,72.123 78.429,72.323
Bottom Layer 1:
  rectangle net NetR36_Axis1_1: 44.465,19.132 45.443,23.536
  rectangle net +12: 22.6,77 24.5,85
  rectangle net Z1_Axis1: 84,51.9 85,55.9
  rectangle net A1_Axis1: 84,40.7 85,44.7
  region net B1_Axis1: 89.4,50.4 88.4,50.4 88.4,46.4 89.4,46.4
  rectangle net Z2_Axis1: 83.901,31.405 84.901,35.405
  rectangle net A2_Axis1: 83.766,19.691 84.766,23.691
  region net B2_Axis1: 89.3,29.571 88.3,29.571 88.3,25.571 89.3,25.571
  region net "AMP1 IN_Axis1_P": 43.2,63.7 43.7,63.2 45.2,63.2 45.5,63.5 45.5,67.5 45.2,67.8 43.5,67.8 43.2,67.5
  region net "AMP1 IN_Axis1_P": 91.8,64.5 91.3,64 88.759,64.002 88,64.631 88,67.2 88.5,67.7 90.6,67.7 91.8,66.5
  region net "AMP1 IN_Axis1_P": 69.3,64 68.8,63.5 64.8,63.5 63.7,64.6 63.7,66.2 64.1,66.6 69,66.6 69.3,66.3
  region net "AMP1 IN_Axis1_P": 97.193,82.214 97.693,82.714 97.693,87.114 97.193,87.614 91.514,87.614 91,87.1 91,82.7 91.486,82.214
  region net "AMP1 IN_Axis1_P": 68.3,82.3 67.9,82.7 67.9,85.8 68.2,86.1 72.9,86.1 75.1,83.9 75.1,82.4 74.9,82.2
  region net "AMP1 IN_Axis1_P": 52.293,81.914 52.793,82.414 52.793,86.814 52.293,87.314 45.993,87.314 45.493,86.814 45.493,82.514 46.093,81.914
  region net "AMP1 IN_Axis1_P": 20.6,83.5 20.6,87.5 18.9,89.2 18.9,92.5 18.6,92.8 14.2,92.8 13.7,92.3 13.7,84.6 14.3,84 18,84 18.6,83.4 20.5,83.4
  region net "AMP1 IN_Axis1_P": 31.7,48.2 31.7,48.7 32.8,49.8 35,49.8 35.1,49.9 35.1,52.2 35,52.3 32.6,52.3 32.6,51.6 30.7,49.7 30.7,48.2
  region net "AMP1 IN_Axis1_P": 39.3,48.3 39.3,46.1 39.1,45.9 38.6,45.9 37.8,46.8 37,46.8 36.9,46.9 36.9,48.3 37.2,48.6 39.1,48.6
  region net "AMP1 IN_Axis1_P": 36.9,46.9 36.6,46.6 36.6,44.1 37.5,43.2 43.7,43.2 43.7,46.7 43.3,47.1 41.7,47.1 40.6,46 39.7,46 39.2,46.5
  region net "AMP1 IN_Axis1_P": 43.6,61.8 43.6,58.2 43.4,58 38.3,58 38.3,59.3 38.7,59.7 41.8,59.7 42.3,60.2 42.3,61.7 42.4,61.8
  region net NetD4_Axis1_2: 84.529,65.023 84.329,65.323 84.329,70.023 84.629,70.323 85.629,70.323 86.429,69.523 86.429,65.323 86.129,65.023
  region net NetC34_Axis1_1: 43.4,56.4 43.7,56.1 43.7,48.9 43.4,48.6 41.1,48.6 41.1,49.1 38.6,51.6 35.773,51.6 35.5,51.873 35.5,55 36.9,56.4 40.5,56.4
  region net NetR27_Axis1_1: 33.8,44.1 33.6,44.3 33.6,46.6 33.3,46.9 33.5,47.1 34.4,47.1 34.4,46 34.8,45.6 34.8,44.2 34.7,44.1
  region net NetR27_Axis1_1: 34.1,48.4 34,48.3 32.9,48.3 32.9,46.9 33,46.8 34.1,46.8 34.4,47.1 34.4,48.3 34.3,48.4
  region net NetC31_Axis1_1: 29.8,51.7 29.2,51.7 29.2,53.5 28.4,54.3 28.4,55 28.5,55.1 29.8,55.1
  region net "MAIN VCC": 42.4,79.25 42.9,79.75 42.9,84.15 42.4,84.65 36.1,84.65 35.6,84.15 35.6,79.85 36.2,79.25
  region net "MAIN VCC": 63.845,79.04 64.345,79.54 64.345,83.94 63.845,84.44 57.545,84.44 57.045,83.94 57.045,79.64 57.645,79.04
  region net "MAIN VCC": 86.629,79.023 87.129,79.523 87.129,83.923 86.629,84.423 80.329,84.423 79.829,83.923 79.829,79.623 80.429,79.023
  region net B2_Axis1: 86.655,7.002 86.664,7.511 86.753,7.6 87.253,7.6 87.349,7.504 87.349,7.002
  region net Z2_Axis1: 87.655,7.002 87.664,7.511 87.753,7.6 88.253,7.6 88.349,7.504 88.349,7.002
  region net A2_Axis1: 85.655,7.002 85.664,7.511 85.753,7.6 86.253,7.6 86.349,7.504 86.349,7.002
  region net A1_Axis1: 82.655,7.002 82.664,7.511 82.753,7.6 83.253,7.6 83.349,7.504 83.349,7.002
  region net B1_Axis1: 81.655,7.002 81.664,7.511 81.753,7.6 82.253,7.6 82.349,7.504 82.349,7.002
  region net Z1_Axis1: 80.655,7.002 80.664,7.511 80.753,7.6 81.253,7.6 81.349,7.504 81.349,7.002
  region net NetC50_Axis1_1: 41.327,36.316 41.334,35.197 38.438,35.138 35.809,32.509 32.903,32.012 32.903,33.603 35.7,36.4 36,36.4
  region net NetC50_Axis1_1: 34.8,26.3 37.1,28.6 37.1,33.9 36.9,34.1 35.9,34.1 32.5,30.7 32.5,26.2
  region net NetR37_Axis1_2: 45.5,27.9 46.3,27.9 46.8,27.4 46.8,25.1 46.9,25 47.9,25 48,25.1 48,28.3 46.7,29.6 45.5,29.6 45.4,29.5 45.4,28
  region net NetC47_Axis1_1: 41,26.8 42.1,27.9 42.6,27.9 42.8,28.1 42.8,29.9 42.5,30.2 38.7,30.2 38.4,29.9 38.4,27.3 38.8,26.9
  region net +12: 24.3,82.2 25.5,83.4 25.5,84.5 24.5,84.5 23.8,83.8
  region net NetC7_Axis1_1: 16.1,76.4 14.5,78 14.5,82.6 14.8,82.9 17.4,82.9 17.4,82.8 18.1,82.1 18.6,82.1 18.7,82 18.7,79.9 18.4,79.6 18.4,76.5 18.3,76.4
  region net +12: 24.3,83.2 26.4,83.2 26.6,83.4 26.6,86.5 26.4,86.7 24.8,86.7 24.6,86.9
  region net +12: 22.6,83.6 22.6,88 20.2,90.4 20.2,91.7 20.6,92.1 23.4,92.1 24.6,90.9 24.6,83.5 24.3,83.2 23,83.2
  region net NetR7_Axis1_1: 21.3,76.2 21.3,74.2 20.9,73.8 20.9,73 19.8,73 20.4,73.6 20.4,76.2 20.5,76.3 21.2,76.3
  region net NetR7_Axis1_1: 17.9,71.5 18,71.4 20.9,71.4 21,71.5 21,72.9 20.9,73 18,73 17.9,72.9
  region net NetD3_Axis1_2: 66.254,68.248 62.254,68.248 62.154,68.348 62.154,69.748 62.654,70.248 66.354,70.248 66.654,69.948 66.654,68.548
  region net NetD2_Axis1_2: 39.723,65.263 39.523,65.563 39.523,70.263 39.823,70.563 40.823,70.563 41.623,69.763 41.623,65.563 41.323,65.263
L2_GND (plane layer: these items are gaps in the copper):
  lines w0.3: 11.9,20 11.9,99.4 ; 13.9,14.1 36.6,14.1 ; 37.7,13 37.7,3.4 37.8,3.3 47.8,3.3 48.2,3.7 48.2,9.6 48.9,10.3 50.1,10.3 50.9,9.5 50.9,3.3 51,3.2 87.8,3.2 88.3,3.7 88.3,10 88.3,10.1 88.8,10.6 91.2,10.6
L3_PWR (plane layer: these items are gaps in the copper):
  lines w0.5: 55.4,50.9 53.9,52.4 43.6,52.4 40.2,49 43.5,45.7 44.52,46.72 48.6,42.64 48.6,38.4 49.4,37.6 49.5,37.6 49.6,37.7 52.4,37.7 53.3,36.8 53.3,34.8 54.8,33.3 54.8,31.8 56.4,30.2 83.6,30.2 84.5,29.3 84.5,18.9 85.2,18.2 92.9,18.2 93.4,18.7 93.4,56.4 83.9,56.4 83.5,56 83.5,52.5 82,51
  lines w0.6: 48.5,40.1 35.3,40.1 34.2,39 27.7,39 26.5,37.8 26.5,30.6 27.7,29.4 30.9,29.4 35.3,33.8 46.4,33.8 54.3,25.9 78.4,25.9 80,24.3 80,14.3 83.6,10.7 96,10.7 99.3,14 99.3,14.7 99.3,56.4 93.4,56.4 ; 55.4,50.9 67.4,50.9 67.4,58.4 68.5,59.5 70.4,59.5 71,58.9 71,51.2 71.2,51 82,51 ; 19.7,91 19.7,97.6 20.1,98 96.9,98 99.1,95.8 99.1,78.4 99.1,77.2 98.7,76.8 96,76.8 96,78.3 96,79.1 96,93.9 95,94.9 76.2,94.9 76.2,78.1 76.2,76.3 73.8,76.3 73.7,76.4 73.7,94.1 72.9,94.9 55.8,94.9 54.6,93.7 54.6,77.2 53.6,76.2 52.3,76.2 51.7,76.8 51.7,93.7 50.3,95.1 28.7,95.1 27.9,94.3 27.9,83.9 26.5,82.5 24.8,82.5 24,83.3 24,86.7 19.7,91

## Text inside footprints (layer, text, board x,y; h text height)
C10_Axis1: Top Overlay "-" at 16.855,94.412 h1.5 r180; Top Overlay "+" at 20.604,94.362 h1.5 r180
C14_Axis1: Bottom Overlay "-" at 16.804,88.264 h1.5; Bottom Overlay "+" at 20.554,88.313 h1.5
C34_Axis1: Bottom Overlay "+" at 45.429,49.014 h1.5 r90; Bottom Overlay "-" at 45.479,45.264 h1.5 r90
C35_Axis1: Bottom Overlay "+" at 40.33,55.977 h1.5 r270; Bottom Overlay "-" at 40.28,59.727 h1.5 r270
C50_Axis1: Bottom Overlay "+" at 41.065,38.31 h1.5 r180; Bottom Overlay "-" at 44.815,38.36 h1.5 r180
C51_Axis1: Bottom Overlay "-" at 30.885,37.185 h1.5 r270; Bottom Overlay "+" at 30.935,33.435 h1.5 r270
C_BULK1_Axis1: Bottom Overlay "+" at 85.279,87.598 h3 r180; Bottom Overlay "-" at 94.029,87.822 h3 r180
C_BULK2_Axis1: Bottom Overlay "-" at 71.899,87.961 h3 r180; Bottom Overlay "+" at 63.149,87.736 h3 r180
C_BULK3_Axis1: Bottom Overlay "-" at 49.407,88.136 h3 r180; Bottom Overlay "+" at 40.657,87.911 h3 r180
U1_Axis1: Top Overlay "8" at 18.468,79.156 h0.4; Top Overlay "1" at 18.423,76.541 h0.4; Mechanical 2 "ADD VIAS" at 22.523,76.586 h0.4 r90
U2_Axis1: Top Overlay "1" at 47.997,75.717 h0.4 r270
U3_Axis1: Top Overlay "1" at 70.074,75.568 h0.4 r270
U4_Axis1: Top Overlay "1" at 92.859,76.027 h0.4 r270
U5_Axis1: Top Overlay "1" at 59.093,55.966 h0.4
U6_Axis1: Top Overlay "1" at 31.582,49.462 h0.4; Top Overlay "8" at 31.627,52.077 h0.4; Mechanical 2 "ADD VIAS" at 35.682,49.507 h0.4 r90
U7_Axis1: Top Overlay "1" at 44.516,52.643 h0.4 r180
U9_Axis1: Top Overlay "1" at 75.137,56.693 h0.4 r270
U10_Axis1: Top Overlay "1" at 42.359,24.367 h0.4; Top Overlay "8" at 42.404,26.982 h0.4; Mechanical 2 "ADD VIAS" at 46.459,24.412 h0.4 r90
U11_Axis1: Top Overlay "1" at 34.558,30.141 h1 r180
U12_Axis1: Top Overlay "1" at 87.909,43.847 h0.4
U13_Axis1: Top Overlay "1" at 87.909,49.455 h0.4
U14_Axis1: Top Overlay "1" at 87.909,55.063 h0.4
U15_Axis1: Top Overlay "1" at 87.72,22.816 h0.4
U16_Axis1: Top Overlay "1" at 87.75,28.678 h0.4
U17_Axis1: Top Overlay "1" at 87.89,34.555 h0.4